# Altium PCB SubPowersupply.PcbDoc
Units mm, origin at the board's own origin, x right, y up, seen from the top; angles counter-clockwise.
Board outline 23.4 x 25.7 mm, 2 copper layers (Top Layer, Bottom Layer); 19 components, 12 nets, 46 pads, 6 vias.
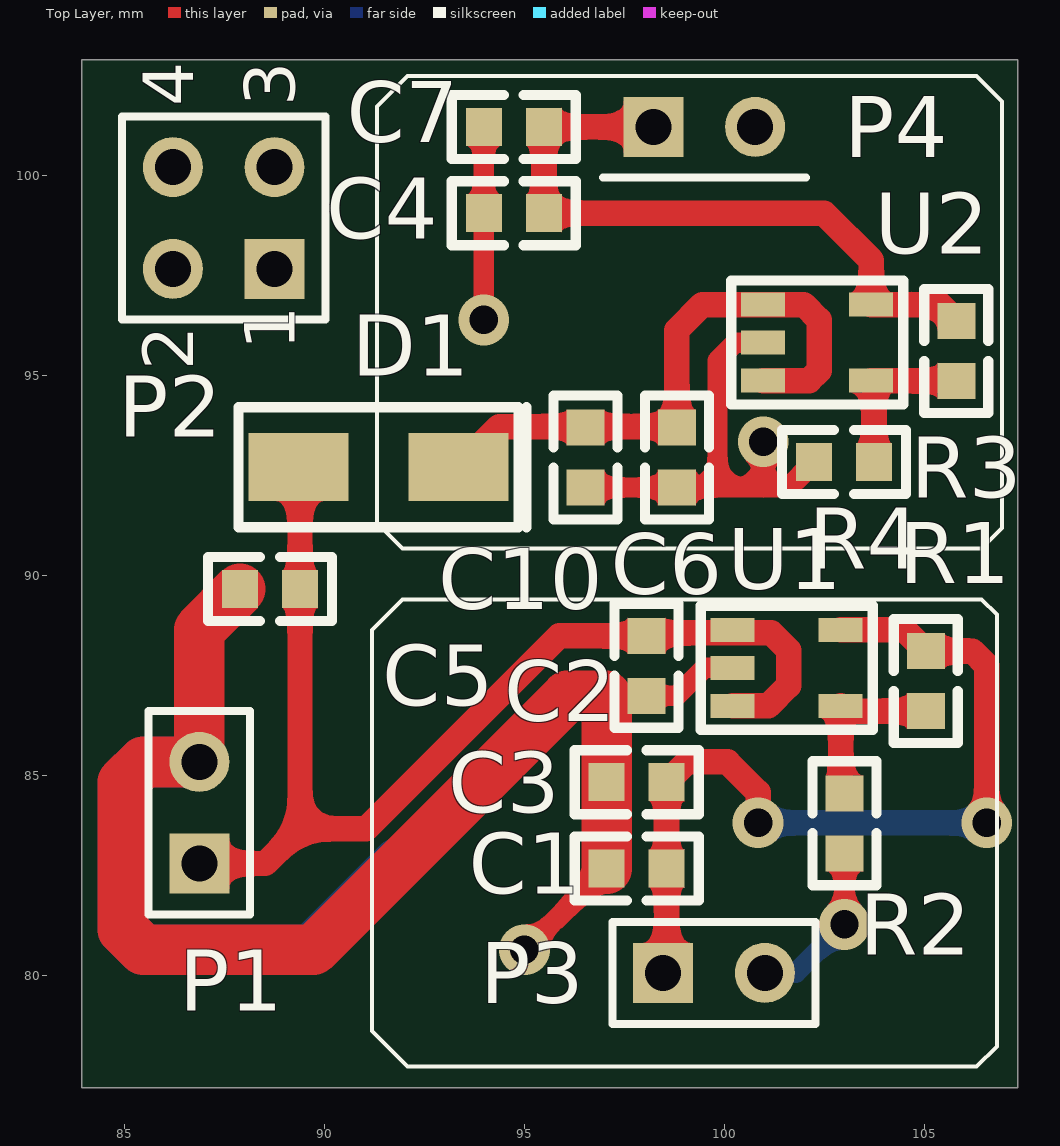
[diagram p0: Top Layer view]
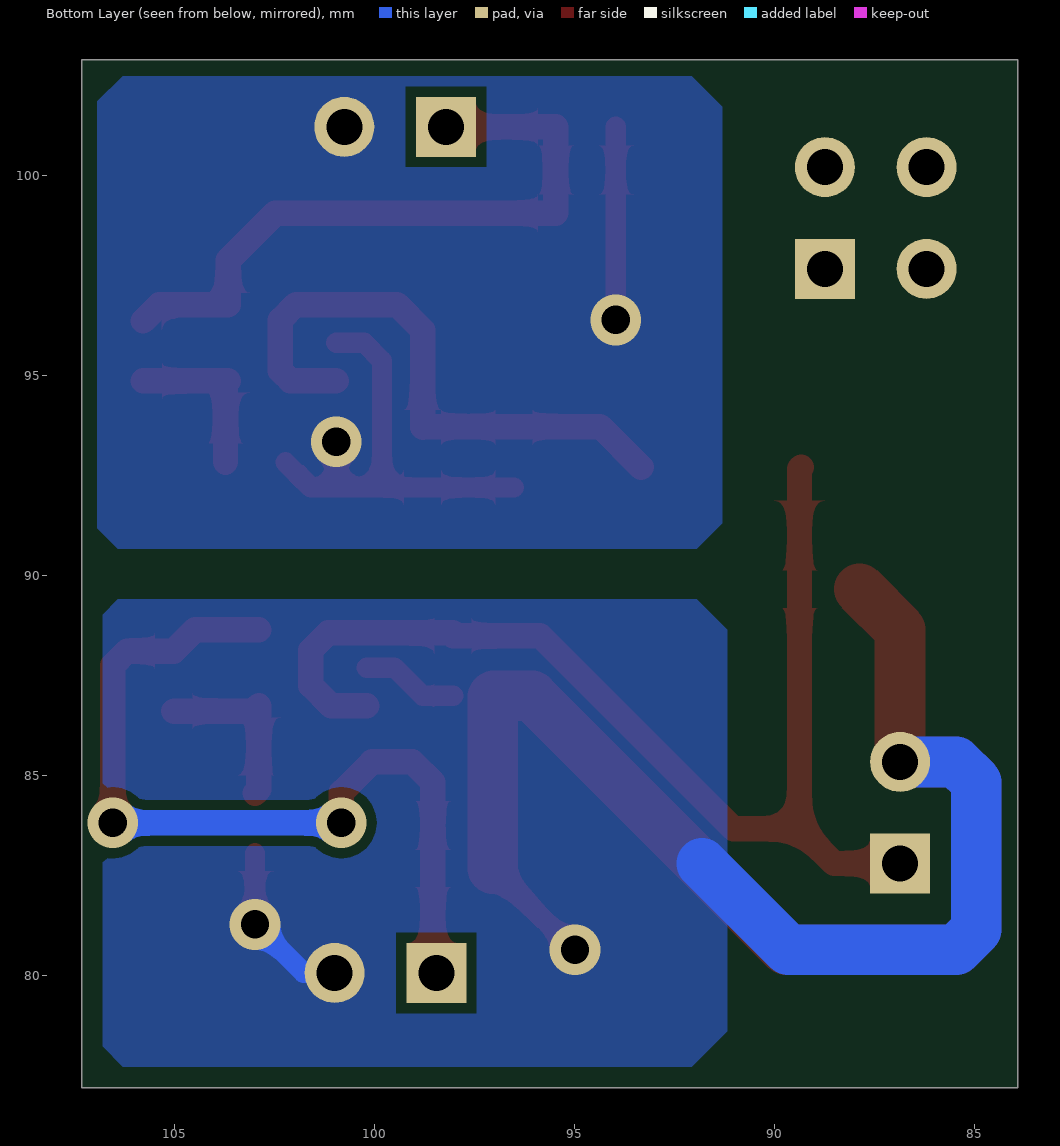
[diagram p1: Bottom Layer view, seen from below]

## Layer stack, top to bottom
Top Solder: solder mask 0.0102, Solder Resist, Dk 3.5
Top Layer: signal copper 0.0356
Dielectric 1: dielectric 0.32, FR-4, Dk 4.8
Bottom Layer: signal copper 0.0356
Bottom Solder: solder mask 0.0102, Solder Resist, Dk 3.5

## Board outline
83.928,77.197 83.928,102.897 107.328,102.897 107.328,77.197

## Design rules (kind name [scope] priority, off if disabled: settings)
Clearance [All] p1: gap=0.254
PolygonConnect [All] p1: connectstyle=Direct reliefconductorwidth=0.254 reliefentries=4 polygonreliefangle="90 Angle" airgapwidth=0.254
RoutingVias [All] p1: holewidth=0.711 width=1.27 viastyle="Through Hole" minholewidth=0.711 minwidth=1.27 maxholewidth=0.711 maxwidth=1.27
SolderMaskExpansion [All] p1: expansion=0.102
Width [All] p1: maxlimit=5.08 minlimit=0.254 preferedwidth=0.254 checkconnectedcopper=TRUE
30 further rules are at their usual default settings.

## Components (designator, comment, footprint, x,y, rotation, side; value= is the part's Value field where it differs from the comment)
C1 "2.2uF" 0603_C 97.052,82.677 r0 top
C2 "1uF" 0603_C 98.044,86.995 r90 top
C3 "0.1uF" 0603_C 97.052,84.836 r0 top
C4 "2.2uF" 0603_C 93.98,99.06 r0 top
C5 "1uF" 0603_C 87.884,89.662 r0 top
C6 "10uF" 0603_C 98.806,92.202 r90 top
C7 "0.1uF" 0603_C 93.98,101.219 r0 top
C10 "10uF" 0603_C 96.52,92.202 r90 top
D1 "Diode" SMA 93.345,92.71 r180 top
P1 "Header 2" HDR1X2 86.868,82.804 r90 top
P2 "Header 2X2" HDR2X2 88.747,97.67 r90 top locked
P3 "Header 2" HDR1X2 98.465,80.066 r0 top locked
P4 "Header 2" HDR1X2 98.225,101.22 r0 top locked
R1 "42K2" 0603_R 105.029,86.614 r90 top
R2 "10K" 0603_R 102.997,83.058 r90 top
R3 "42K2" 0603_R 105.791,94.869 r90 top
R4 "10K" 0603_R 102.235,92.837 r0 top
U1 "MIC5225YM5" SOT23-5 100.203,88.646 r270 top
U2 "MIC5225YM5" SOT23-5 100.965,96.774 r270 top

## Footprints (in the part's own frame and the unit in brackets; to place one, negate y for a bottom-side part, rotate by r counter-clockwise, add the part's x,y. Pads: shape width x height; smd on the part's side, far side on the other; paste and mask are expansions set on the pad)
0603_C [mm]
  rect 0.9x0.95 smd: 1(0,0) 2(1.5,0)
  silkscreen extent -0.8,-0.8 2.3,0.8
0603_R [mm]
  rect 0.9x0.95 smd: 1(0,0) 2(1.5,0)
  silkscreen extent -0.8,-0.8 2.3,0.8
HDR1X2 [mm] "Connector; Header; 2 Position"
  rect 1.5x1.5 hole 0.9: 1(0,0)
  round 1.5 hole 0.9: 2(2.54,0)
  silkscreen extent -1.27,-1.27 3.81,1.27
HDR2X2 [mm] "Connector; Header; 2x2 Position"
  rect 1.5x1.5 hole 0.9: 1(0,0)
  round 1.5 hole 0.9: 2(0,2.54) 3(2.54,0) 4(2.54,2.54)
  silkscreen extent -1.27,-1.27 3.81,3.81
SMA [mm]
  rect 2.5x1.7 smd: 1(4,0) 2(0,0)
  silkscreen extent -1.7,-1.5 5.5,1.5
SOT23-5 [mm]
  rect 0.6x1.1 smd: 1(0,0) 2(0.95,0) 3(1.9,0) 4(1.9,2.7) 5(0,2.7)
  silkscreen extent -0.6,-0.8 2.5,3.5

## Part data
C1 C2 C3 C4 C5 C6 C7 C10: library part Cap, "Capacitor"
D1: "Default Diode"
P1 P3 P4: "Header, 2-Pin"
P2: "Header, 2-Pin, Dual row"
R1 R2 R3 R4: library part "Res Semi", "Semiconductor Resistor"

## Via types
v1: diameter 1.27, hole 0.711, Top Layer to Bottom Layer, 6 vias

## Nets (pads, with @x,y where several pads share a name; then routed paths per layer and width w, separated by ;. In a path a pad name is that pad's centre, name@x,y a point inside that pad or via, vN(x,y) a via of type N, cw(c..) or ccw(c..) an arc to the next point about the centre after c; other vN are vias at no path point)
6.5V: C1.2 C3.2 P3.1 R1.2 U1.5 | length 22.1
  Top Layer w0.635: P3.1 98.552,80.153 C1.2 C3.2 99.06,85.344 100.076,85.344 100.838,84.582 v1(100.838,83.82) ; U1.5 104.497,88.646 R1.2 106.196,88.114 106.553,87.757 v1(106.553,83.82)
  Bottom Layer w0.635: v1(100.838,83.82) v1(106.553,83.82)
9V: C2.2 C5.2 D1.1 P1.1 U1.1 U1.3 | length 30.8
  Top Layer w0.635: P1.1 88.519,82.804 89.384,83.669 ; D1.1 89.384,92.671 89.384,83.669 ; 89.384,85.574 89.384,83.669 ; U1.3 101.097,86.746 101.6,87.249 101.6,88.138 101.171,88.567 98.044,88.567 C2.2 95.861,88.495 91.035,83.669 89.384,83.669
+5V: P2.2
BUS_GND: C1.1 C2.1 C3.1 C5.1 P1.2 P3.2 R2.1 U1.2 | length 53.2
  Top Layer w0.508: v1(94.996,80.645) 95.02,80.645 C1.1 ; C2.1 98.806,86.995 99.507,87.696 U1.2 ; v1(102.997,81.28) R2.1
  Top Layer w1.27: C5.1 86.868,88.646 P1.2 85.471,85.344 84.963,84.836 84.963,81.153 85.471,80.645 89.717,80.645 96.067,86.995 97.028,86.995 97.052,86.971 C3.1 C1.1
  Bottom Layer w0.508: P3.2 101.783,80.066 v1(102.997,81.28)
  Bottom Layer w1.27: P1.2 85.471,85.344 84.963,84.836 84.963,81.153 85.471,80.645 89.662,80.645 91.821,82.804
DGND: P2.4
MID_6.5V: C4.2 C7.2 P4.1 R3.2 U2.5 | length 17
  Top Layer w0.635: P4.1 P4.1 C7.2 C4.2 102.489,99.06 103.665,97.884 U2.5 105.386,96.774 R3.2
MID_9V: C6.2 C10.2 D1.2 U2.1 U2.3 | length 15.1
  Top Layer w0.635: D1.2 94.361,93.726 98.782,93.726 C6.2 98.806,96.139 99.441,96.774 U2.1 101.981,96.774 102.362,96.393 102.362,95.123 102.113,94.874 U2.3
MID_GND: C4.1 C6.1 C7.1 C10.1 P4.2 R4.1 U2.2 | length 16.5
  Top Layer w0.508: v1(93.98,96.393) C4.1 C7.1 ; C10.1 C6.1 99.822,92.202 ; v1(100.965,93.345) 100.965,92.202 ; U2.2 100.269,95.824 99.822,95.377 99.822,92.202 ; R4.1 101.6,92.202 100.965,92.202 ; 99.822,92.202 100.965,92.202
NetR1_1: R1.1 R2.2 U1.4 | length 4.4
  Top Layer w0.635: R2.2 102.903,84.652 U1.4 103.035,86.614 R1.1
NetR3_1: R3.1 R4.2 U2.4 | length 4.2
  Top Layer w0.635: R4.2 103.735,94.804 103.67,94.869 R3.1
PWM_DOWN: P2.3
PWM_UP: P2.1

## Polygon pours and split planes (outlines as drawn)
BUS_GND on Bottom Layer "Top Layer-No Net" (solid, pour order 8): 91.186,88.646 91.948,89.408 106.426,89.408 106.807,89.027 106.807,78.232 106.299,77.724 92.075,77.724 91.186,78.613 91.186,88.646
MID_GND on Bottom Layer "Top Layer-No Net" (solid, pour order 10): 91.313,101.727 92.075,102.489 106.299,102.489 106.934,101.854 106.934,91.186 106.426,90.678 91.948,90.678 91.313,91.313 91.313,101.727

## Silkscreen, mask and mechanical layers (free items; w line width, h text height)
Top Overlay:
  lines w0.1: 91.186,78.613 92.075,77.724 106.299,77.724 106.807,78.232 106.807,89.027 106.426,89.408 91.948,89.408 91.186,88.646 91.186,78.613 ; 91.313,91.313 91.313,101.727 92.075,102.489 106.299,102.489 106.934,101.854 106.934,91.186 106.426,90.678 91.948,90.678 91.313,91.313
Mechanical 1:
  the board outline again, w0.1
Drill Drawing:
  text ".Legend" at 108.458,77.597 h1.52

## Text inside footprints (layer, text, board x,y; h text height)
P2: Top Overlay "1" at 89.255,95.638 h1.27 r90; Top Overlay "2" at 86.715,95.13 h1.27 r90; Top Overlay "4" at 86.715,101.734 h1.27 r90; Top Overlay "3" at 89.255,101.734 h1.27 r90